# Altium PCB SFPextension.PcbDoc
Units mil, origin at the board's own origin, x right, y up, seen from the top; angles counter-clockwise.
Board outline 2595 x 745 mil, 2 copper layers (Top Layer, Bottom Layer); 3 components, 15 nets, 39 pads, 5 vias.
Unrouted connection lines stored in the file: 1.
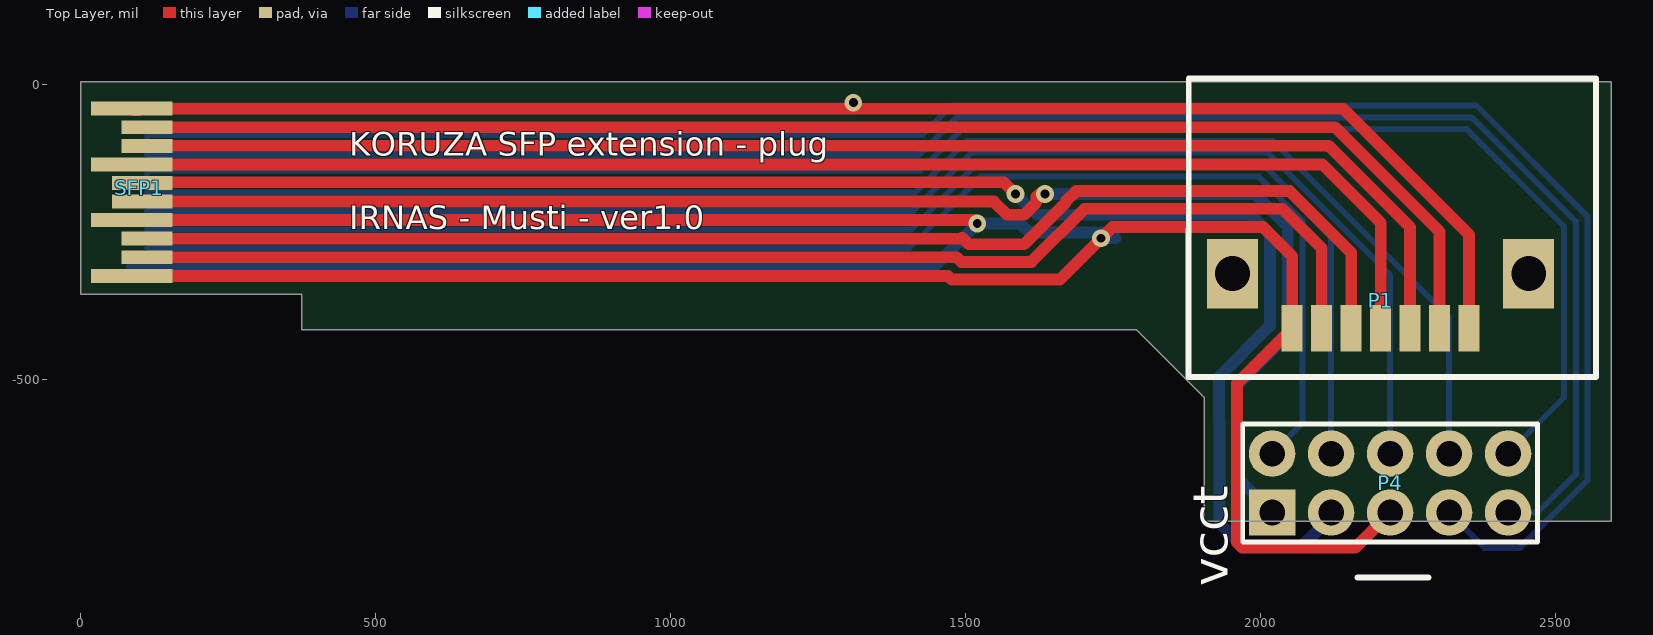
[diagram p0: Top Layer view]
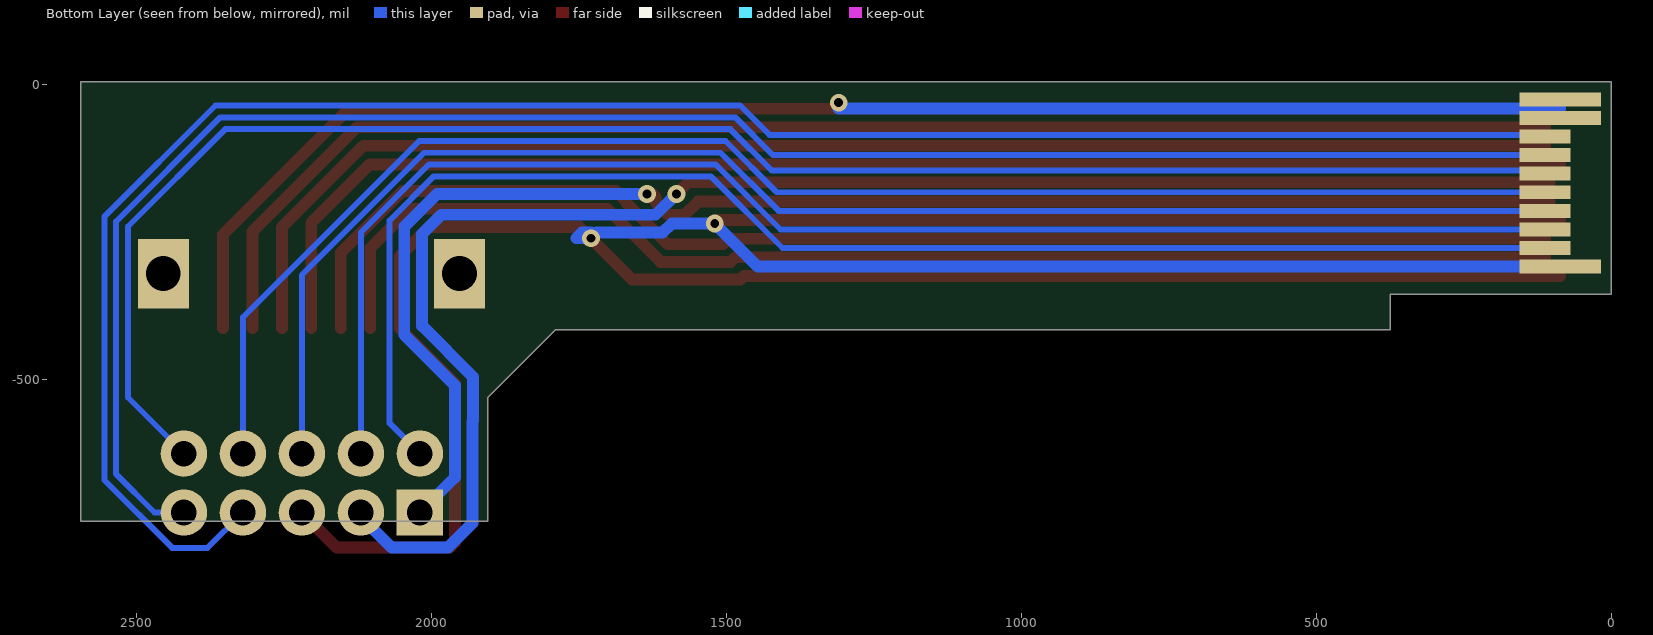
[diagram p1: Bottom Layer view, seen from below]

## Layer stack, top to bottom
Top Solder: solder mask 0.4, Solder Resist, Dk 3.5
Top Layer: signal copper 1.4
Dielectric1: dielectric 12.6, FR-4, Dk 4.8
Bottom Layer: signal copper 1.4
Bottom Solder: solder mask 0.4, Solder Resist, Dk 3.5

## Board outline
0,5 0,-355 375,-355 375,-415 1790,-415 1905,-530 1905,-740 2595,-740 2595,5

## Design rules (kind name [scope] priority, off if disabled: settings)
Clearance Clearance_2 [InPolygon] p1: gap=15
Clearance Clearance_1 [(InComponent('SFP1') AND IsPad)] p2: gap=7.5
Clearance [All] p3: gap=10
PolygonConnect [All] p1: connectstyle=Relief reliefconductorwidth=20 reliefentries=4 polygonreliefangle="90 Angle" airgapwidth=10
RoomDefinition SFPextension [InComponentClass('SFPextension')] p1: confinementstyle=ConfineIn formatcopy=TRUE lockcomponents=FALSE outline -13.39,-805 2586.61,-805 2586.61,25.87 -13.39,25.87
RoutingVias [All] p1: holewidth=28 width=50 viastyle="Through Hole" minholewidth=28 minwidth=50 maxholewidth=28 maxwidth=50
SilkToSolderMaskClearance SilkscreenOverComponentPads [IsPad] p1: minsilkscreentomaskgap=10 clearancetoexposedcopper=TRUE
SolderMaskExpansion [All] p1: expansion=4
UnpouredPolygon [All] p1: allowunpoured=FALSE
Width [All] p1: maxlimit=40 minlimit=10 preferedwidth=20
28 further rules are at their usual default settings.

## Components (designator, comment, footprint, x,y, rotation, side; value= is the part's Value field where it differs from the comment)
P1 "SATA" "SATA pcb" 2455,-320 r180 top
P4 "Header 5X2A" HDR2X5_CEN 2020,-725 r0 top
SFP1 "SFP connector" "SFP pcb con" 86.61,-174.13 r90 top

## Footprints (in the part's own frame and the unit in brackets; to place one, negate y for a bottom-side part, rotate by r counter-clockwise, add the part's x,y. Pads: shape width x height; smd on the part's side, far side on the other; paste and mask are expansions set on the pad)
HDR2X5_CEN [mm] "Connector; Header; 5x2 Position"
  rect 2x2 hole 1.1: 1(0,0)
  round 2 hole 1.1: 2(2.54,0) 3(5.08,0) 4(7.62,0) 5(10.16,0) 6(0,2.54) 7(2.54,2.54) 8(5.08,2.54) 9(7.62,2.54) 10(10.16,2.54)
  silkscreen extent -1.27,-1.27 11.43,3.81
"SATA pcb" [mm]
  rect 2.2x3 hole 1.5: 0(0,0) 0(12.75,0)
  rect 0.9x2 smd: 1(2.565,2.35) 2(3.835,2.35) 3(5.105,2.35) 4(6.375,2.35) 5(7.645,2.35) 6(8.915,2.35) 7(10.185,2.35)
  silkscreen extent -2.9,-8.4 14.65,4.45
"SFP pcb con" [mm]
  rect 0.6x3.5 smd far side: 1(-3.4,0) 9(3,0) 10(3.8,0)
  rect 0.6x2.2 smd far side: 2(-2.6,-0.65) 3(-1.8,-0.65) 4(-1,-0.65) 5(-0.2,-0.65) 6(0.6,-0.65) 7(1.4,-0.65) 8(2.2,-0.65)
  rect 0.6x3.5 smd: 11(3.4,0) 14(1,0) 17(-1.4,0) 20(-3.8,0)
  rect 0.6x2.2 smd: 12(2.6,-0.65) 13(1.8,-0.65) 18(-2.2,-0.65) 19(-3,-0.65)
  rect 0.6x2.6 smd: 15(0.2,-0.45) 16(-0.6,-0.45)

## Part data
P1: "sata"
P4: "Header, 5-Pin, Dual row"

## Via types
v1: diameter 30, hole 15, Top Layer to Bottom Layer, tented both sides, 5 vias

## Nets (pads, with @x,y where several pads share a name; then routed paths per layer and width w, separated by ;. In a path a pad name is that pad's centre, name@x,y a point inside that pad or via, vN(x,y) a via of type N, cw(c..) or ccw(c..) an arc to the next point about the centre after c; other vN are vias at no path point)
GND: P1.7 P4.3 SFP1.1 SFP1.17 SFP1.20 | length 5998.6
  Top Layer w20: SFP1.20 1470.39,-323.74 1476.65,-330 1660,-330 v1(1730,-260) 1749.06,-240.94 2004.62,-240.94 2054.02,-290.34 P1.7 1960.63,-505.91 1960.63,-775.63 1969.37,-784.37 2160.63,-784.37 P4.3 ; SFP1.17 1514.25,-229.25 v1(1520,-235)
  Bottom Layer w20: SFP1.1 1447.01,-307.99 v1(1520,-235) 1593.08,-235 1608.08,-250 v1@1720,-250 ; v1(1730,-260) 1755,-260 1745,-250 v1@1730,-250
LOS: P4.4 SFP1.8 | length 3296.7
  Bottom Layer w10: SFP1.8 114.72,-85 1427.01,-85 1477.01,-35 2366.57,-35 2555,-223.43 2555,-670 2440,-785 2380,-785 P4.4
MOD_DEF0: P4.10 SFP1.6 | length 2926.8
  Bottom Layer w10: SFP1.6 117.72,-145 1423.58,-145 1493.58,-75 2350,-75 2515,-240 2515,-530 P4.10
MOD_DEF1: P4.9 SFP1.5 | length 2598.9
  Bottom Layer w10: SFP1.5 1414.86,-182.01 1501.86,-95 2021.31,-95 2320,-393.69 P4.9
MOD_DEF2: P4.8 SFP1.4 | length 2537.4
  Bottom Layer w10: SFP1.4 1411.64,-213.5 1510.15,-115 2013.03,-115 2220,-321.97 P4.8
NetP1_1: P1.1 P1.4 SFP1.9 SFP1.10 SFP1.11 SFP1.14 | length 6096.7
  Top Layer w20: SFP1.14 2104.91,-134.76 2204.02,-233.87 P1.4 ; SFP1.11 88.8,-42.46 99.09,-42.46 101.27,-40.28 2140.28,-40.28 2354.02,-254.02 P1.1
  Bottom Layer w20: 86.61,-40 1310,-40 1310,-25 v1(1310,-30)
NetP1_2: P1.2 SFP1.12 | length 2428.7
  Top Layer w20: SFP1.12 2126.77,-71.77 2304.02,-249.02 P1.2
NetP1_3: P1.3 SFP1.13 | length 2370.1
  Top Layer w20: SFP1.13 2115.84,-103.27 2254.02,-241.44 P1.3
NetP1_5: P1.5 SFP1.18 | length 2256.8
  Top Layer w20: SFP1.18 1492.26,-260.75 1493.75,-259.25 1494.75,-259.25 1505.5,-270 1599.5,-270 1670,-199.5 1670,-197.57 1687.57,-180 2049.85,-180 2154.02,-284.16 P1.5
NetP1_6: P1.6 SFP1.19 | length 2195.8
  Top Layer w20: SFP1.19 1485.32,-292.24 1493.08,-300 1611.92,-300 1701.92,-210 2037.43,-210 2104.02,-276.59 P1.6
RATE_SEL: P4.5 SFP1.7 | length 3067.7
  Bottom Layer w10: SFP1.7 1421.28,-119.02 1485.29,-55 2358.28,-55 2535,-231.72 2535,-660 2470,-725 P4.5@2445,-725
TX_DISABLE: P4.7 SFP1.3 | length 2475.8
  Bottom Layer w10: SFP1.3 1408.43,-245 1518.43,-135 2004.74,-135 2120,-250.26 P4.7
TX_FAULT: P4.6 SFP1.2 | length 2456.9
  Bottom Layer w10: SFP1.2 1405.22,-276.5 1526.72,-155 1996.46,-155 2071.34,-229.88 2071.34,-573.66 P4.6
VCCR: P4.2 SFP1.15 | length 2710.2
  Top Layer w20: SFP1.15 105.59,-165 1565,-165 v1(1585,-185)
  Bottom Layer w20: v1(1585,-185) 1585.5,-185 1620.5,-220 1983.68,-220 2016.34,-252.66 2016.34,-408.66 1930,-495 1930,-569.37 1930.63,-570 1930.63,-742.65 1972.35,-784.37 2067.65,-784.37 2120,-732.02 P4.2
VCCT: P4.1 SFP1.16 | length 2539
  Top Layer w20: SFP1.16 1548.26,-197.76 1570.5,-220 1599.5,-220 1620,-199.5 1620,-190 1625,-185 v1(1635,-185)
  Bottom Layer w20: v1(1635,-185) 1991.1,-185 2046.34,-240.23 2046.34,-423.66 1960.63,-509.37 1960.63,-665.63 P4.1
pads on no net: P1.0

## Silkscreen, mask and mechanical layers (free items; w line width, h text height)
Top Overlay:
  lines w10: 2165,-835 2285,-835
  text "KORUZA SFP extension - plug" at 455,-120 h40
  text "IRNAS - Musti - ver1.0" at 455,-245 h40
  text "vcct" at 1945,-850 h60 r90
Mechanical 3:
  lines w5: 334.65,-353.27 373.27,-353.27 375,-355 1730,-355 1785,-410 1785,-865 2620,-865 2620,5 334.65,5